# Altium PCB TD_pcb.PcbDoc
Units mm, origin at the board's own origin, x right, y up, seen from the top; angles counter-clockwise.
Board outline 50 x 50 mm, 2 copper layers (Top Layer, Bottom Layer); 4 components, 4 nets, 26 pads, 0 vias.
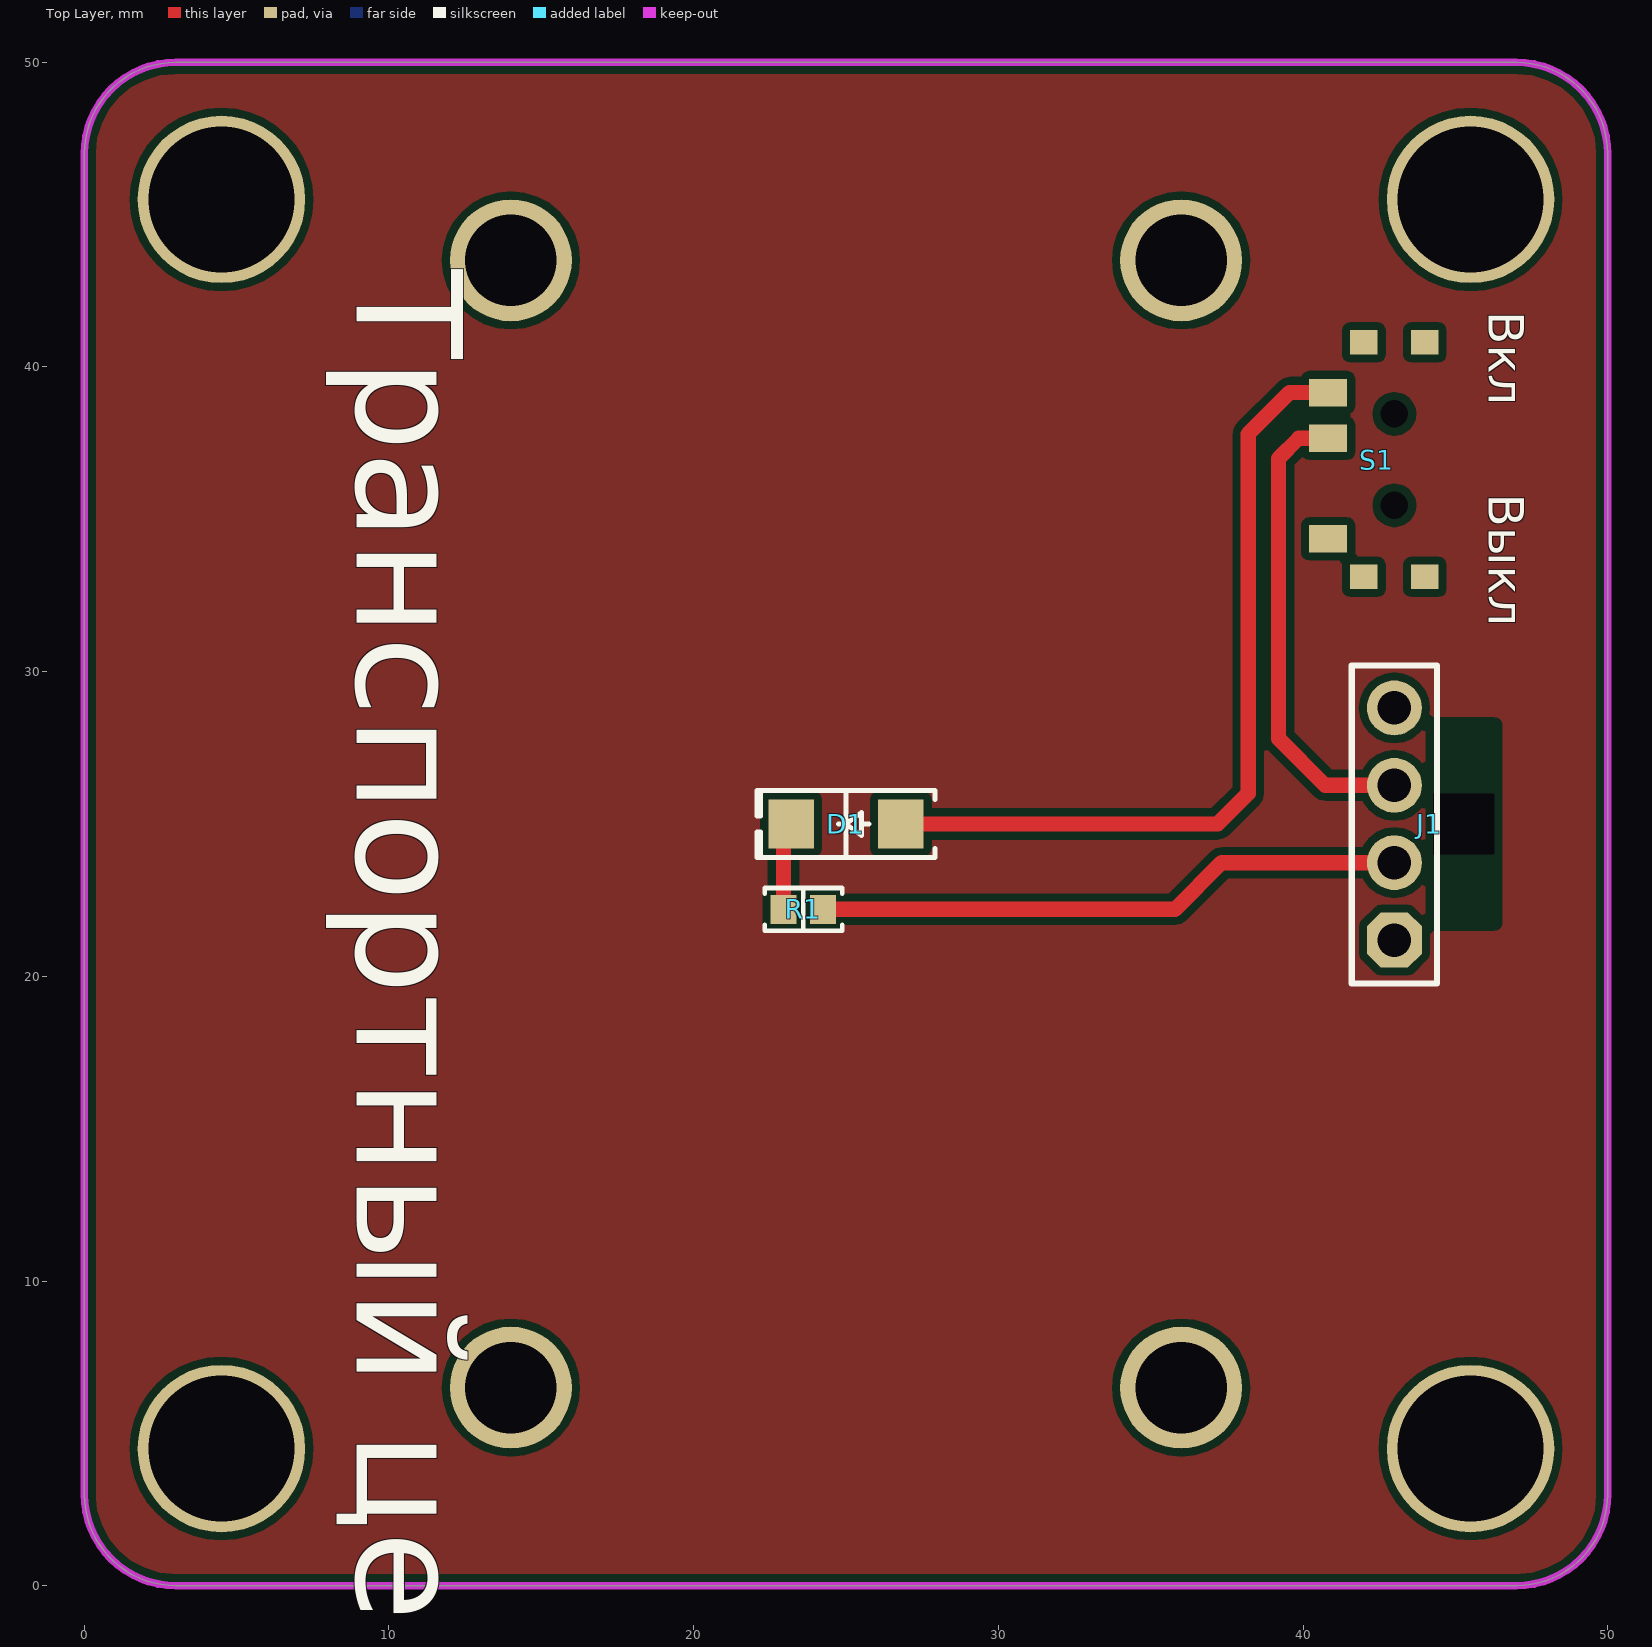
[diagram p0: Top Layer view]
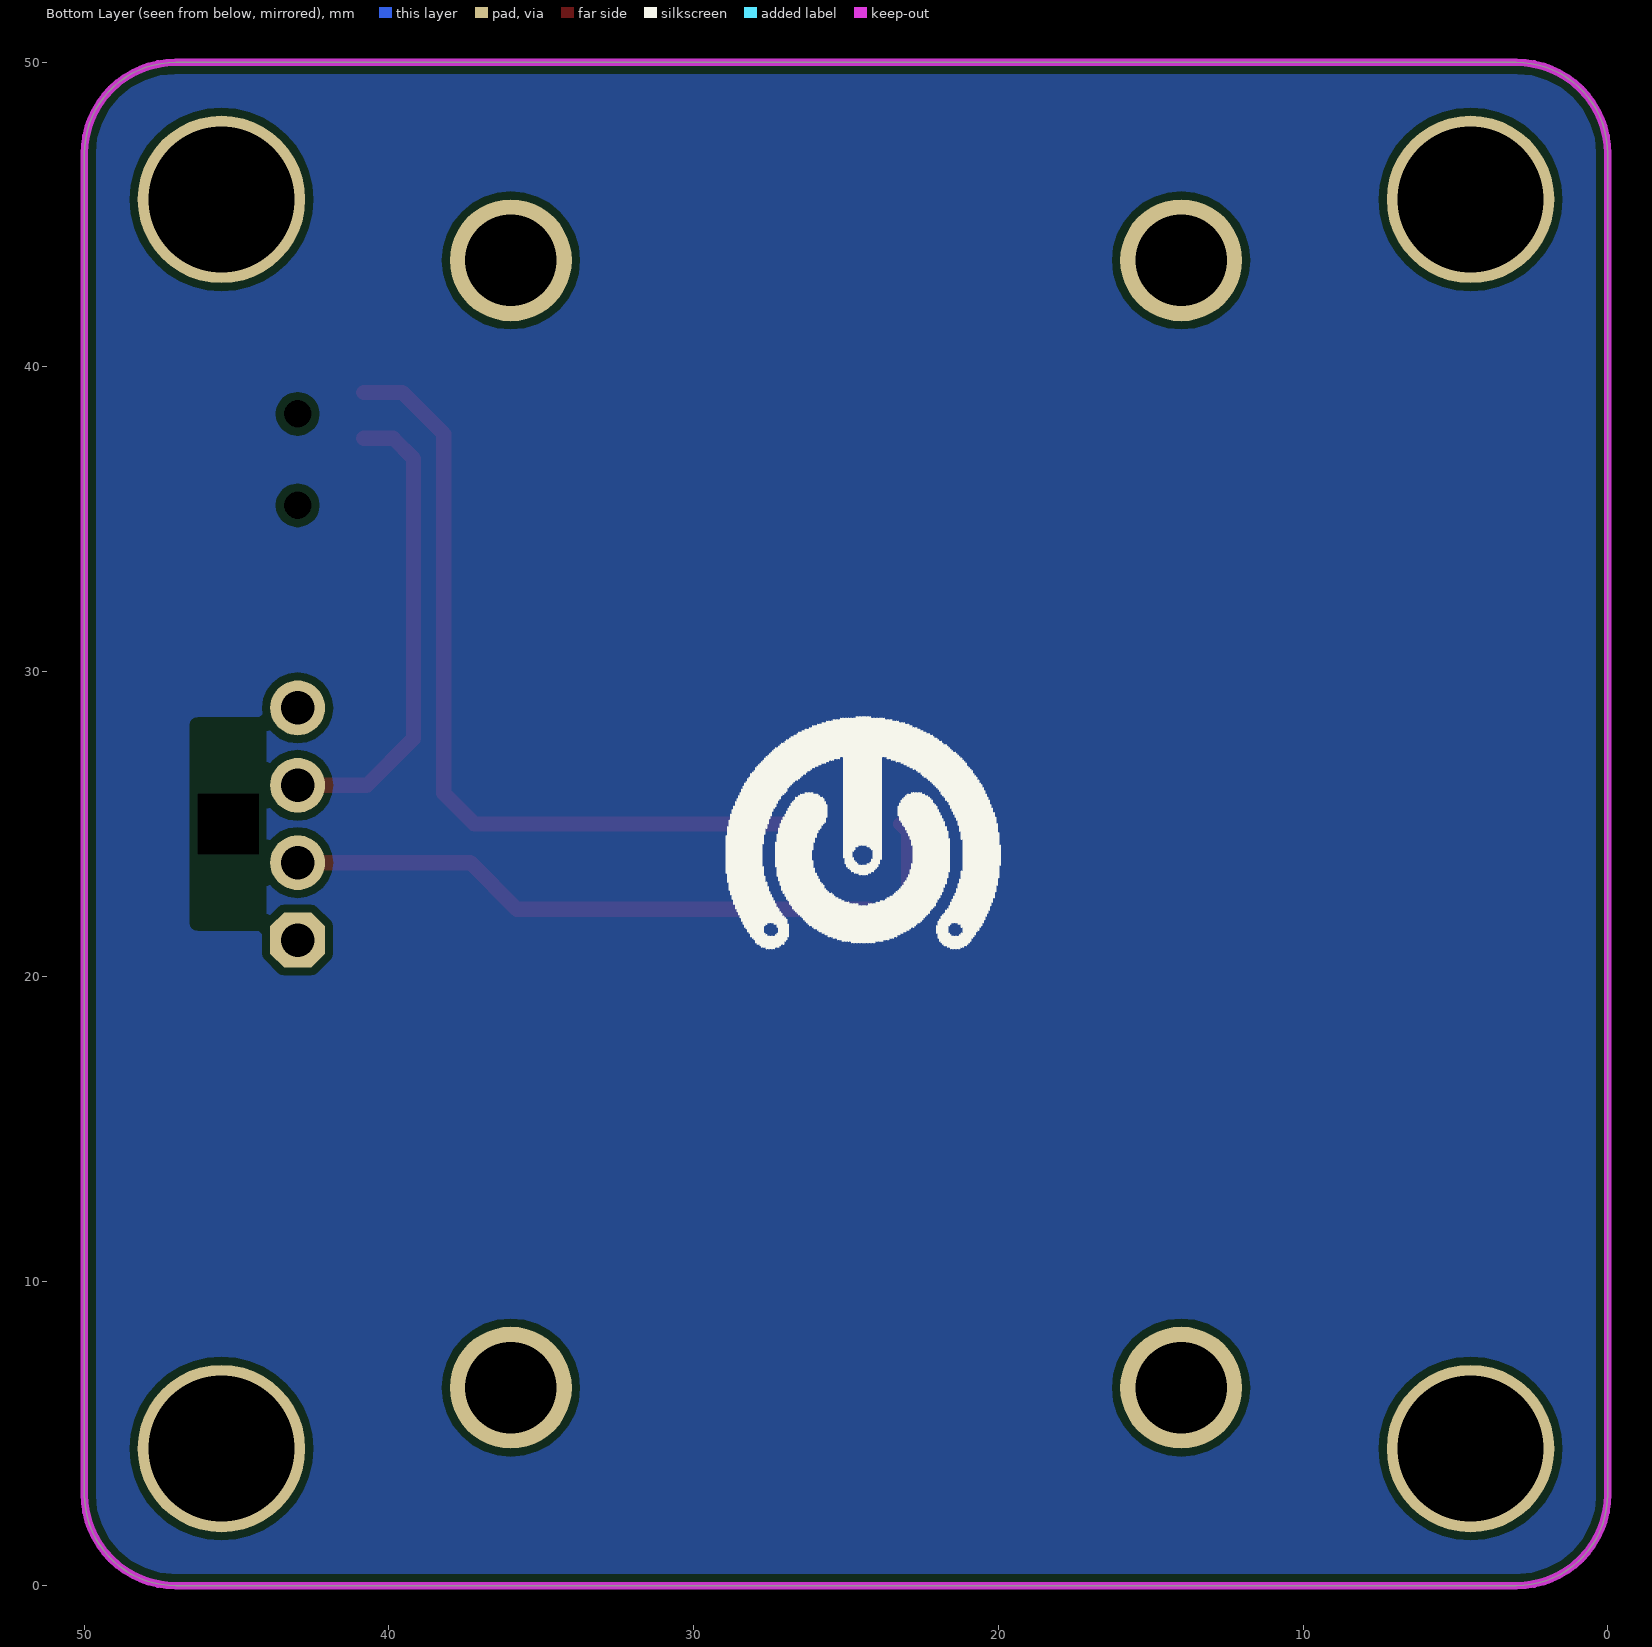
[diagram p1: Bottom Layer view, seen from below]
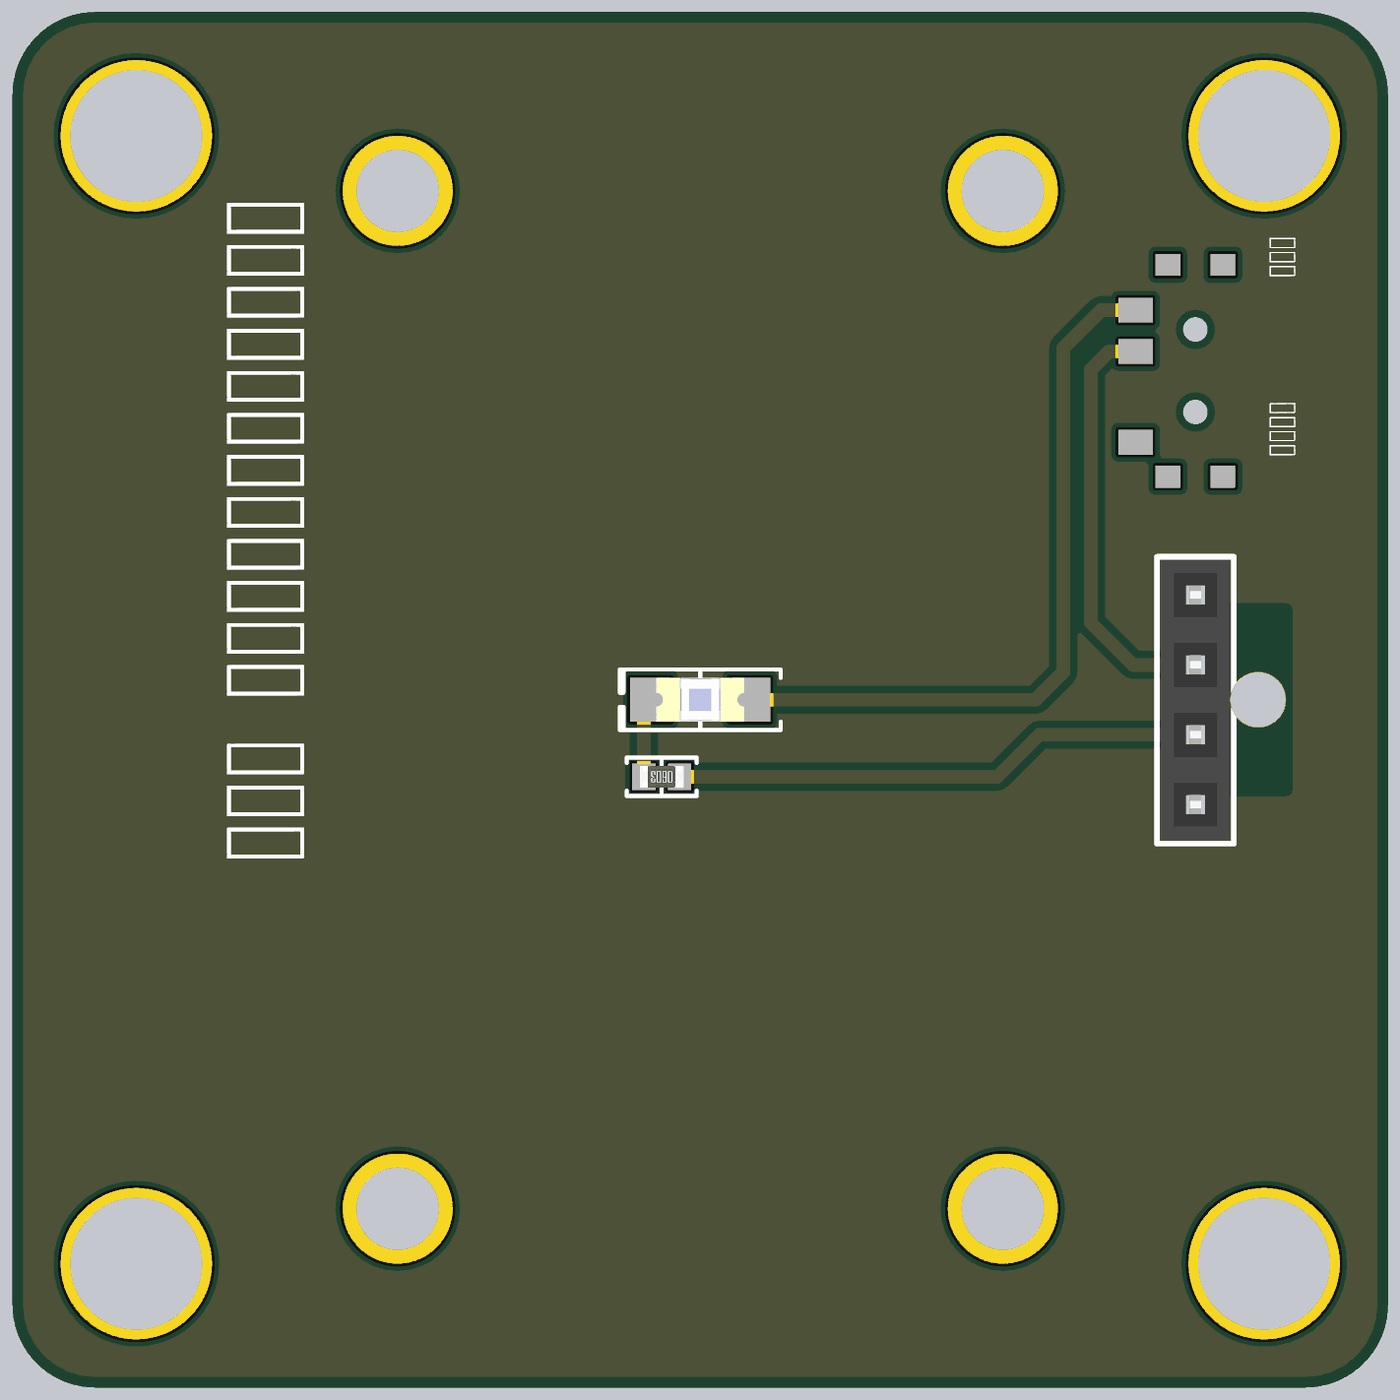
[diagram p2: 3D render of the assembled board from above, using the file's embedded part models]

## Layer stack, top to bottom
Top Solder: solder mask 0.0102, Solder Resist, Dk 3.5
Top Layer: signal copper 0.0356
Dielectric 1: dielectric 0.32, FR-4, Dk 4.8
Bottom Layer: signal copper 0.0356
Bottom Solder: solder mask 0.0102, Solder Resist, Dk 3.5

## Board outline
0,3 ccw(c3,3) 3,0 47,0 ccw(c47,3) 50,3 50,47 ccw(c47,47) 47,50 3,50 ccw(c3,47) 0,47

## Design rules (kind name [scope] priority, off if disabled: settings)
Clearance [All] p1: gap=0.254 ignorepadtopadclearanceinfootprint=FALSE except(0: Arc-Hole Track-Hole SMDPad-Hole THPad-Hole Via-Hole Fill-Hole Poly-Hole Region-Hole Text-Hole)
PolygonConnect [All] p1: connectstyle=Relief reliefconductorwidth=0.254 reliefentries=4 polygonreliefangle="90 Angle" airgapwidth=0.254
RoutingVias [All] p1: holewidth=0.711 width=1.27 viastyle="Through Hole" minholewidth=0.711 minwidth=1.27 maxholewidth=0.711 maxwidth=1.27
SolderMaskExpansion [All] p1: expansion=0.102
Width [All] p1: maxlimit=2 minlimit=0.254 preferedwidth=0.5
30 further rules are at their usual default settings.

## Components (designator, comment, footprint, x,y, rotation, side; value= is the part's Value field where it differs from the comment)
D1 "Blue" "LED 1206_3216 BLUE" 25,25 r180 top
J1 "PBS 4" "PBS-4 CUT" 43,25 r90 top
R1 "10 kOhms" "RES 0603_1608" 23.6,22.2 r180 top
S1 "S1" switcher 43,37 r0 top

## Footprints (in the part's own frame and the unit in brackets; to place one, negate y for a bottom-side part, rotate by r counter-clockwise, add the part's x,y. Pads: shape width x height; smd on the part's side, far side on the other; paste and mask are expansions set on the pad)
"LED 1206_3216 BLUE" [mm] "Chip Diode, 2-Leads, Body 3.13x1.55mm, IPC Medium Density"
  rect 1.5x1.6 smd: 1(-1.8,0) 2(1.8,0)
  silkscreen extent -2.92,-1.1 2.92,1.1, body extent -1.6,-0.8 1.6,0.8, height 0.9
"PBS-4 CUT" [mm]
  oct 1.8x1.8 hole 1.1: 1(-3.81,0)
  round 1.8 hole 1.1: 2(-1.27,0) 3(1.27,0) 4(3.81,0)
  rrect50% 0x0 hole 2 square: ""(0,-2.28)
  silkscreen extent -5.23,-1.4 5.2,1.4, body extent -5.08,-1.27 5.08,1.27, height 8.4
"RES 0603_1608" [mm] "Chip Resistor, 2-Leads, Body 1.60x0.80mm, IPC Medium Density"
  rect 0.85x0.95 smd: 1(-0.65,0) 2(0.65,0)
  silkscreen extent -1.27,-0.7 1.27,0.7, body extent -0.8,-0.4 0.8,0.4, height 0.45
switcher [mm] "SS-3292S-L1"
  rect 1.25x0.9 smd: 1(-2.175,-2.639) 2(-2.175,0.661) 3(-2.175,2.161)
  rect 0.9x0.8 smd: ""(-1,-3.889) ""(-1,3.811) ""(1,-3.889) ""(1,3.811)
  round 0 hole 0.9 unplated: ""(0,-1.539) ""(0,1.461)
  body extent -1.52,-4.38 1.52,4.38, height 6

## Part data
D1: library part SML-LXLC1206USBCTR, "LED BLUE CLEAR SMD", Current - Test=20mA, Device Package="1206 (3216 Metric)", Lens Color=Colorless, Manufacturer="Lumex Opto/Components Inc.", Millicandela Rating=250mcd, Supplier Device Package=SMD, Supplier Part Number 1=67-2218-1-ND, Voltage - Forward (Vf) (Typ)=3.3V, Color=Blue, ComponentLink1Description=Datasheet, ComponentLink1URL=https://www.lumex.com/content/files/ProductAttachment/SML-LXLC1206USBCTR.pdf, ComponentLink2Description="DigiKey Link", ComponentLink2URL=http://digikey.com/product-detail/en/lumex-opto-components-inc/SML-LXLC1206USBCTR/67-2218-1-ND/4496785, Configuration=Standard, Height (Max)=1.10mm, LastUpdated="21.01.2020 3:11:27", Lens Size="1.60mm Dia", Lens Style="Round with Flat Top", Lens Transparency=Clear, Lifecycle Status=Active, Minimum Order=1, Mounting Type="Surface Mount", Package / Case="1206 (3216 Metric)", Packaging=TapeAndReel, PartId=727, Part Number=SML-LXLC1206USBCTR, Part Status=Active, Price=0.20, Series=-, Size / Dimension="3.20mm L x 1.60mm W", Supplier 1=DigiKey, Viewing Angle=70°, Wavelength - Peak=460nm
R1: library part RNCS0603BKE10K0, "RES 10K OHM 0.1% 1/16W 0603", Device Package="0603 (1608 Metric)", Manufacturer="Stackpole Electronics Inc", Operating Temperature="-55°C ~ 155°C", Power (Watts)="0.063W, 1/16W", Ratings=AEC-Q200, Supplier Device Package=0603, Supplier Part Number 1=RNCS0603BKE10K0CT-ND, Temperature Coefficient=±25ppm/°C, Tolerance=±0.1%, ComponentLink1Description=Datasheet, ComponentLink1URL=https://www.seielect.com/catalog/sei-rncs_rnch.pdf, ComponentLink2Description="DigiKey Link", ComponentLink2URL=http://digikey.com/product-detail/en/stackpole-electronics-inc/RNCS0603BKE10K0/RNCS0603BKE10K0CT-ND/1800113, Composition="Thin Film", Features="Anti-Corrosive, Automotive AEC-Q200, Moisture Resistant", Height - Seated (Max)="0.022\" (0.55mm)", LastUpdated="21.01.2020 0:25:01", Lifecycle Status=Active, Minimum Order=1, Number of Terminations=2, Package / Case="0603 (1608 Metric)", Packaging=TapeAndReel, PartId=4838, Part Number=RNCS0603BKE10K0, Part Status=Active, Price=0.08, Resistance="10 kOhms", Series=RNCS, Size / Dimension="0.061\" L x 0.031\" W (1.55mm x 0.80mm)", Supplier 1=DigiKey
S1: library part switcher

## Free pads (board coordinates)
  round 5.5 hole 4.8: 7(4.5,4.5) 7(4.5,45.5) 7(45.5,4.5) 7(45.5,45.5)
  round 4 hole 3: 8(14,6.5) 8(14,43.5) 8(36,6.5) 8(36,43.5)

## Nets (pads, with @x,y where several pads share a name; then routed paths per layer and width w, separated by ;. In a path a pad name is that pad's centre, name@x,y a point inside that pad or via, vN(x,y) a via of type N, cw(c..) or ccw(c..) an arc to the next point about the centre after c; other vN are vias at no path point)
GND: J1.2 R1.1 | length 19.4
  Top Layer w0.5: R1.1 35.8,22.2 37.33,23.73 J1.2
NetD1_1: D1.1 S1.3 | length 26.8
  Top Layer w0.5: D1.1 37.2,25 38.2,26 38.2,37.8 39.561,39.161 S1.3
NetD1_2: D1.2 R1.2 | length 2.9
  Top Layer w0.5: R1.2 22.95,24.75 D1.2
NetJ1_3: J1.3 S1.2 | length 15.5
  Top Layer w0.5: S1.2 39.861,37.661 39.2,37 39.2,27.8 40.73,26.27 J1.3
pads on no net: J1. J1.1 J1.4 S1. S1.1

## Polygon pours and split planes (outlines as drawn)
no net on Top Layer "Top Layer-No Net" (solid, pour order 0): 0,3 ccw(c3,3) 3,0 47,0 ccw(c47,3) 50,3 50,47 ccw(c47,47) 47,50 3,50 ccw(c3,47) 0,47
no net on Bottom Layer "Top Layer-No Net1" (solid, pour order 1): 0,3 ccw(c3,3) 3,0 47,0 ccw(c47,3) 50,3 50,47 ccw(c47,47) 47,50 3,50 ccw(c3,47) 0,47

## Keep-outs
Keep-Out Layer:
  the board outline again, w0.254

## Silkscreen, mask and mechanical layers (free items; w line width, h text height)
Top Overlay:
  text "Транспортный цех" at 7.8,43.2 h6 r270
  text "Вкл" at 45.701,41.835 h2 r270
  text "Выкл" at 45.701,35.835 h2 r270
Bottom Overlay:
  drawing of 376 lines, arcs and shapes, not listed